# Altium PCB PCB.PcbDoc
Units mil, origin at the board's own origin, x right, y up, seen from the top; angles counter-clockwise.
Board outline 2247 x 1385 mil, 4 copper layers (Top Layer, Layer 1, Layer 2, Bottom Layer), stack 51.756 mil thick; 28 components, 43 nets, 111 pads, 38 vias.
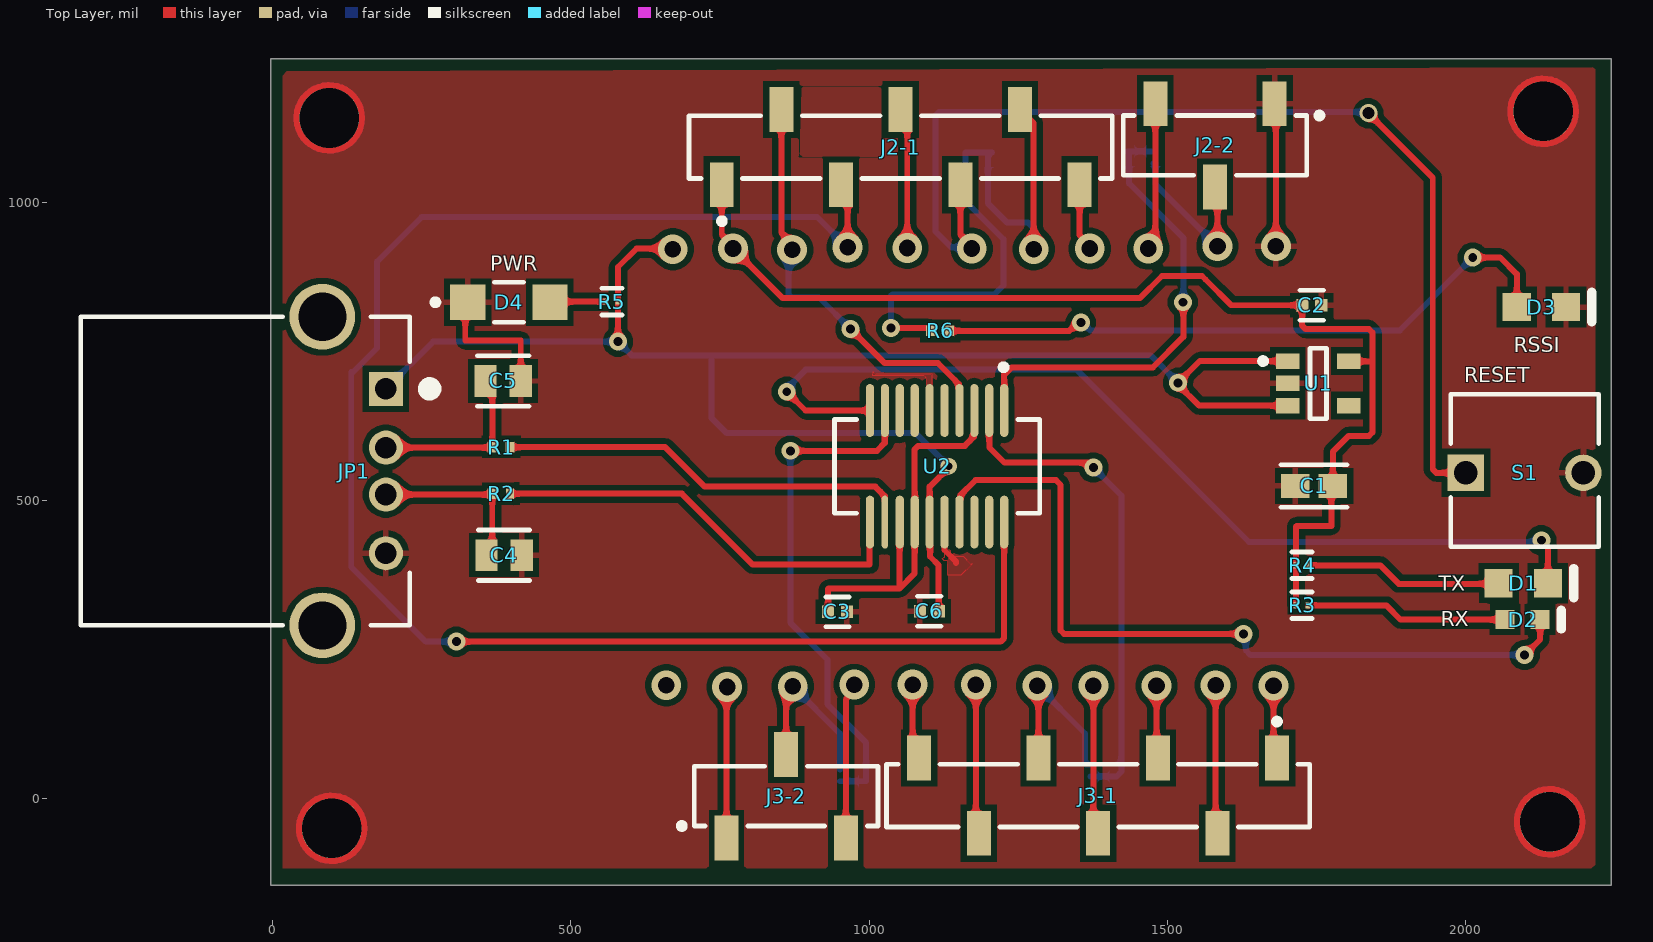
[diagram p0: Top Layer view]
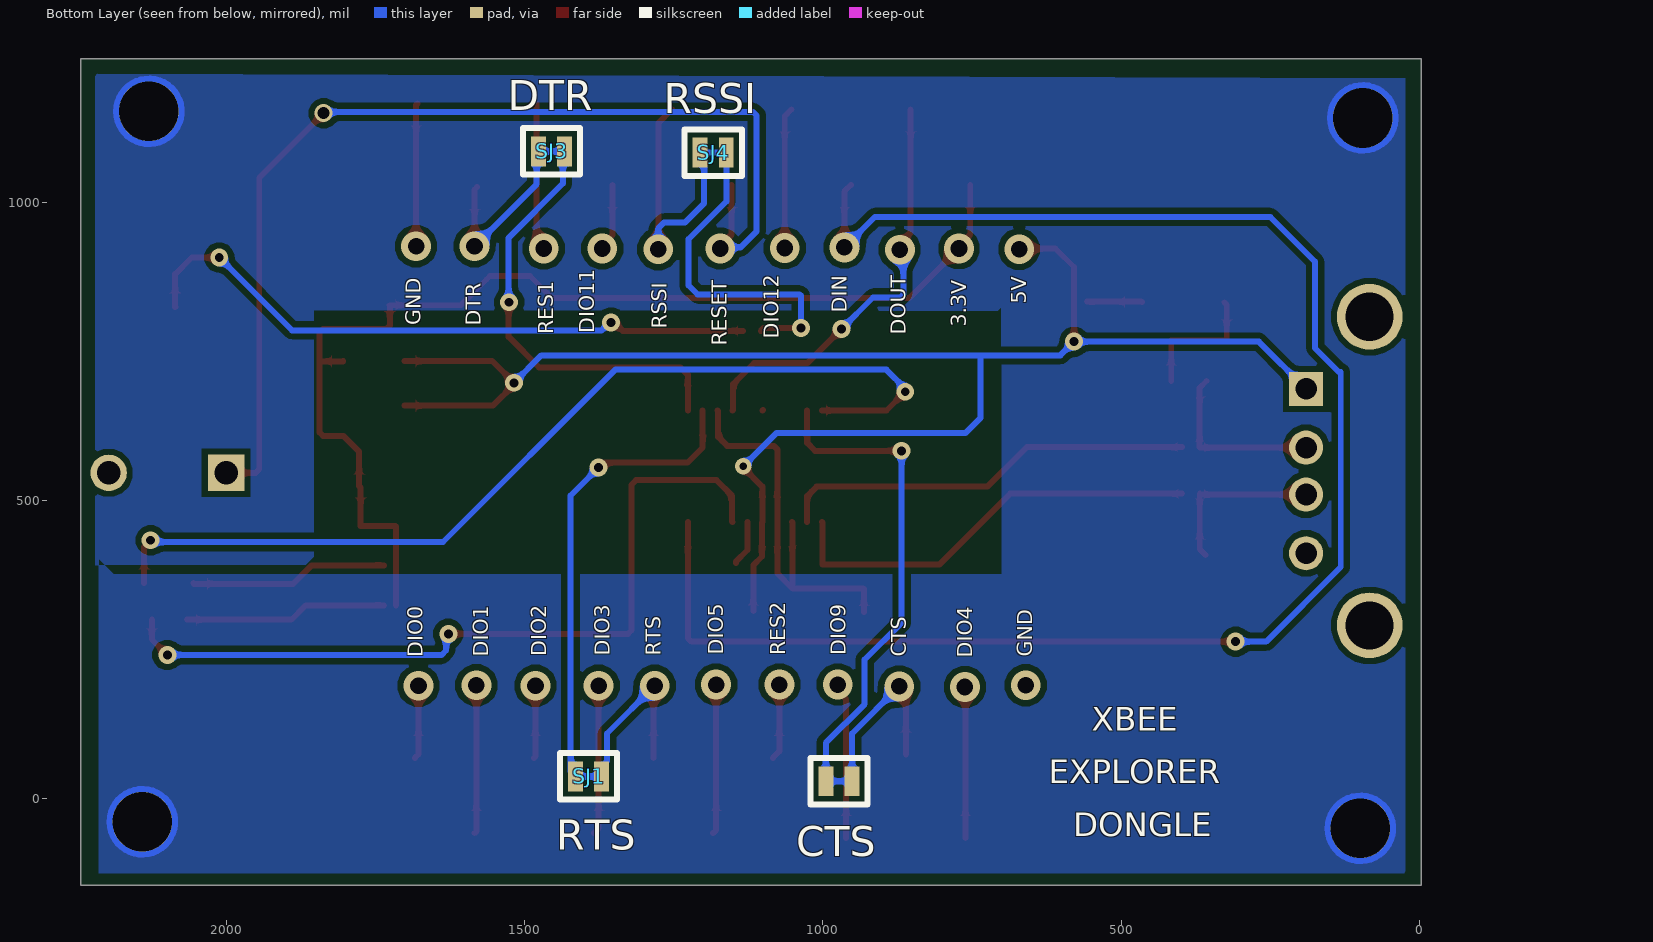
[diagram p1: Bottom Layer view, seen from below]
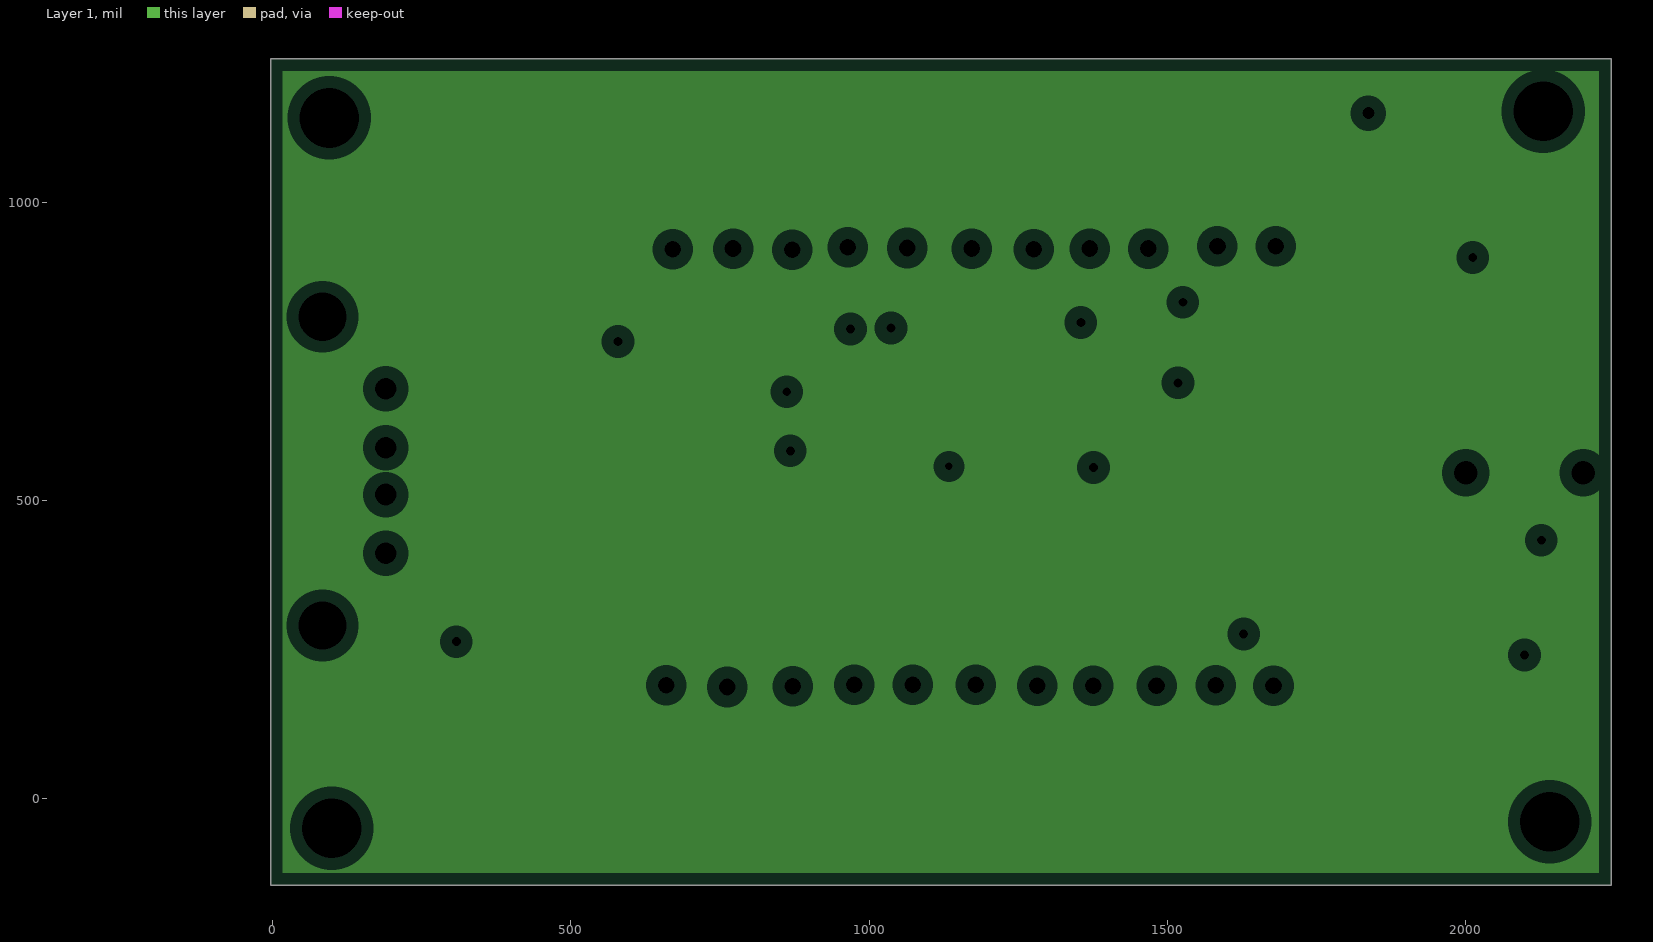
[diagram p2: Layer 1, clearances drawn from the general rule]
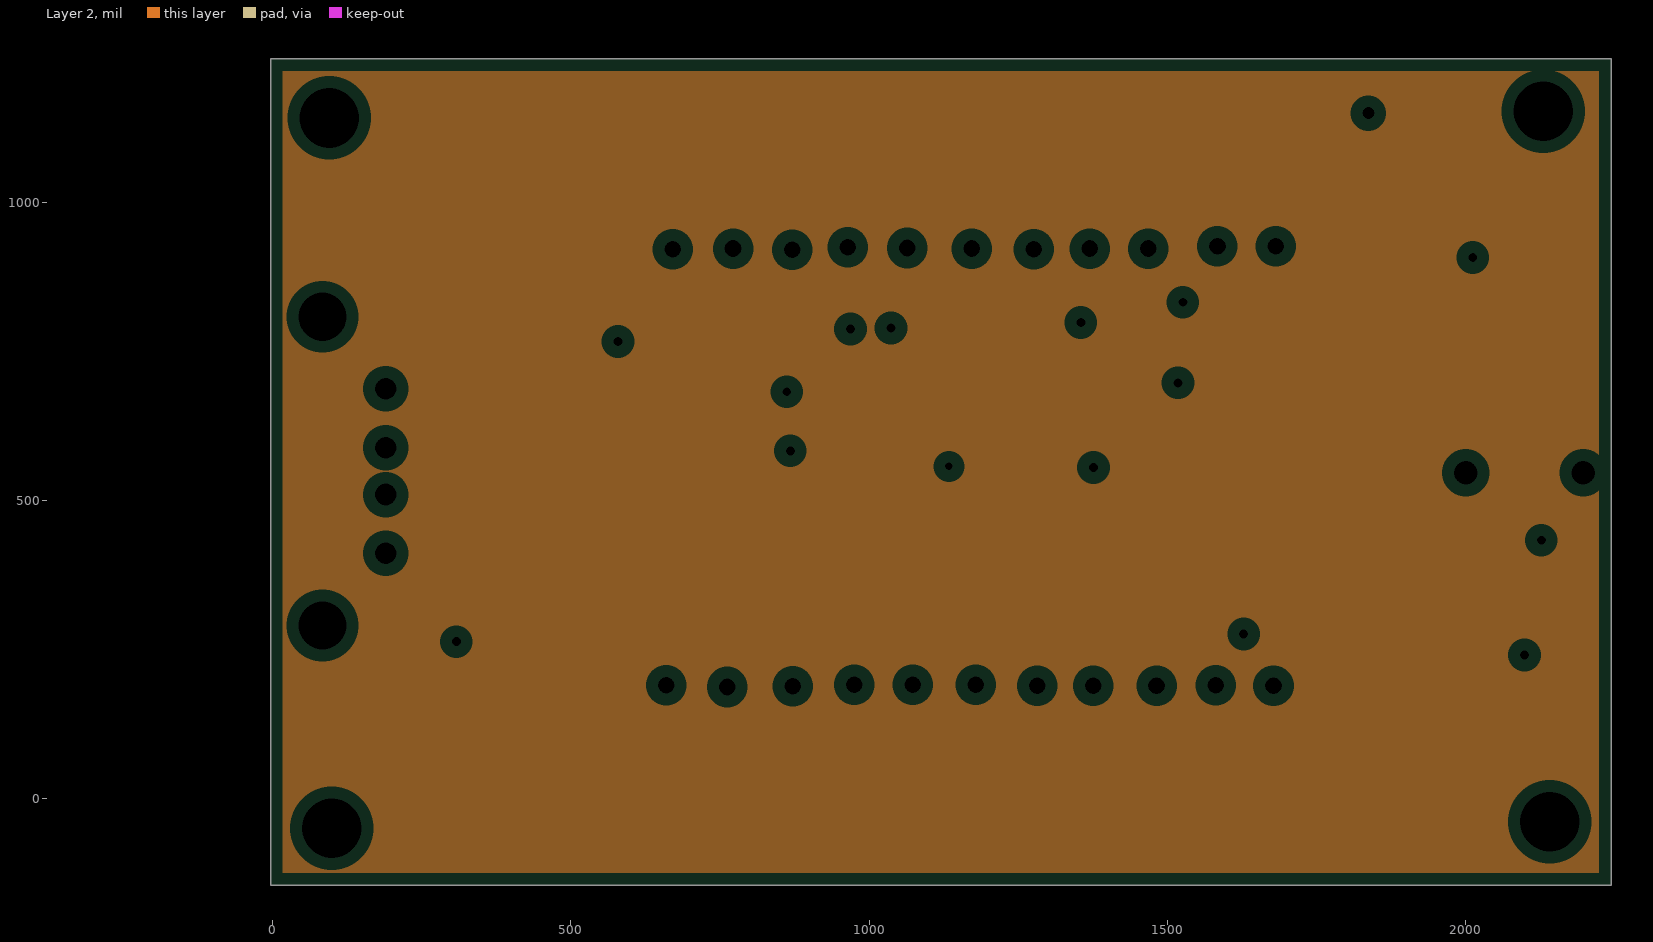
[diagram p3: Layer 2, clearances drawn from the general rule]
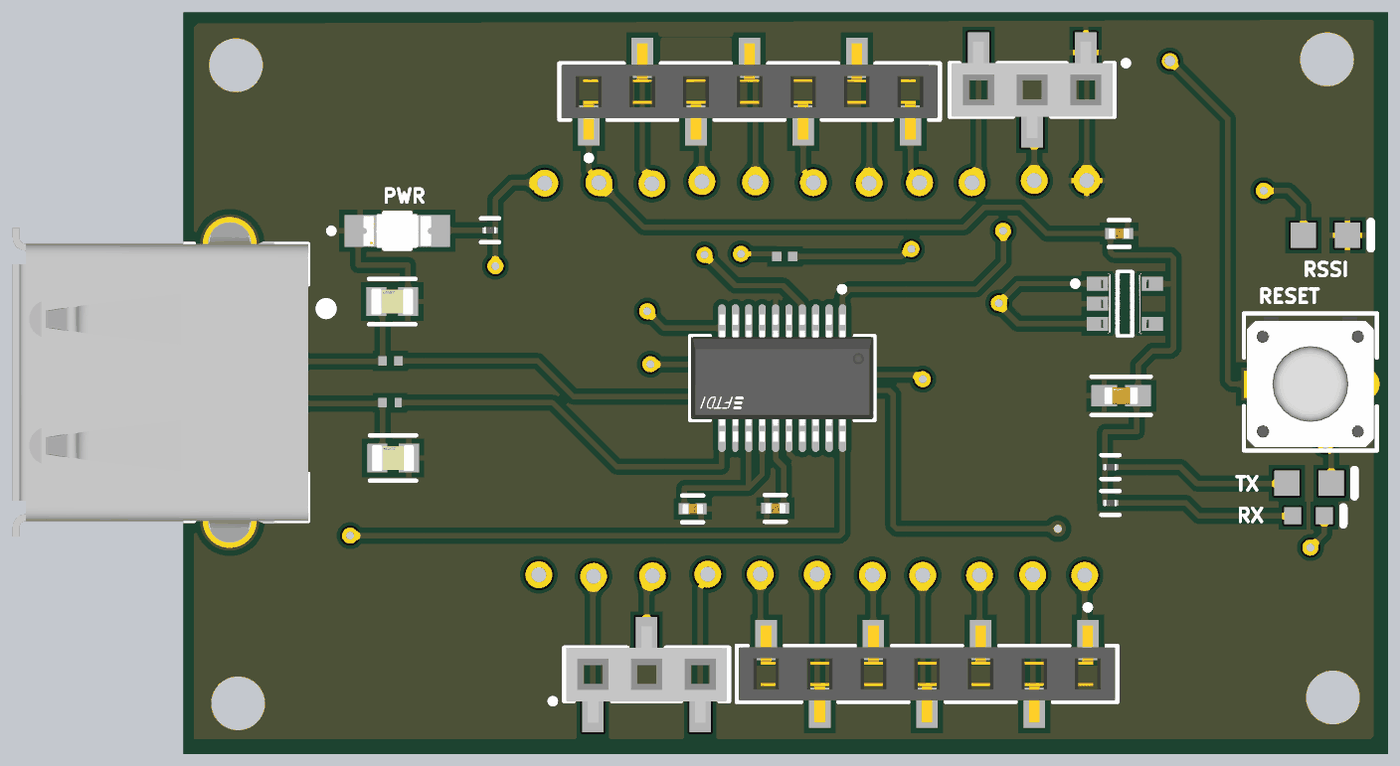
[diagram p4: 3D render of the assembled board from above, using the file's embedded part models]

## Layer stack, top to bottom
Top Solder: solder mask 0.4, Solder Resist, Dk 3.5
Top Layer: signal copper 1.4
Dielectric 2: prepreg 8.8, PP-006, Dk 4.1
Layer 1: plane copper 1.378
Dielectric 1: core 28.6, FR-4, Dk 4.8
Layer 2: plane copper 1.378
Dielectric 3: prepreg 8.8, PP-006, Dk 4.1
Bottom Layer: signal copper 1.4
Bottom Solder: solder mask 0.4, Solder Resist, Dk 3.5

## Board outline
-3,-145 2244,-145 2244,1240 -3,1240

## Design rules (kind name [scope] priority, off if disabled: settings)
Clearance [All] p1: gap=10 ignorepadtopadclearanceinfootprint=FALSE
PlaneClearance [All] p1: clearance=20
PlaneConnect [All] p1: planeconnectstyle=Relief reliefexpansion=20 reliefentries=4 reliefconductorwidth=10 reliefairgap=10
PolygonConnect [All] p1: connectstyle=Relief reliefconductorwidth=10 reliefentries=4 polygonreliefangle="90 Angle" airgapwidth=10
RoutingVias [All] p1: holewidth=20 width=30 viastyle="Through Hole" minholewidth=10 minwidth=20 maxholewidth=40 maxwidth=50
ShortCircuit [All] p1: allowed=TRUE
SolderMaskExpansion [All] p1: expansion=4 istentingtop=FALSE
SupplyNets "Schematic Supply Nets_2" [InNet('5V')] p1: voltage=0.000
SupplyNets "Schematic Supply Nets_1" [InNet('GND')] p2: voltage=0.000
SupplyNets "Schematic Supply Nets" [InNet('3.3V')] p3: voltage=0.000
Width [All] p1: maxlimit=20 minlimit=5 preferedwidth=10
27 further rules are at their usual default settings.

## Classes and differential pairs
component class Xbee: J2-1 J2-2 J3-1 J3-2
component class regulator: C1 C2 D3 D4 R5 R6 S1 U1
component class USB: C3 C4 C5 C6 D1 D2 JP1 R1 R2 R3 R4 U2

## Components (designator, comment, footprint, x,y, rotation, side; value= is the part's Value field where it differs from the comment)
C1 "10uF" FP-GRM188-0_1-e0_2_0_55-IPC_A 1746,524 r180 top
C2 "0.1uF" FP-C0402-BB-MFG 1742.25,827 r0 top value="0.10 μF"
C3 "0.1uF" FP-C0402-BB-MFG 947,313 r0 top value="0.10 μF"
C4 "47pF" FP-C0805C-DN-MFG 388,408 r0 top value="47 pF"
C5 "47pF" FP-C0805C-DN-MFG 386.53,700 r0 top value="47 pF"
C6 "0.1uF" FP-C0402-BB-MFG 1101,314 r180 top value="0.10 μF"
CTS "Solder Jumper" "Solder Jumper-Footprint-1"#1 973,29 r180 bottom (schematic designator SJ2)
D1 "Green" AVAG-HSMX-C170_V 2096.66,361 r0 top
D2 "Yellow" AVAG-HSMX-C190_V 2095.47,300 r0 top
D3 "Green" AVAG-HSMX-C170_V 2127,824 r0 top
D4 "Red" FP-HSMS-C150-MFG 396,832 r0 top
J2-1 "SSM-107-L-SV-BE" FP-SSM-107-L-SV-BE-MFG#1 1053,1092 r0 top
J2-2 "SSM-103-L-SV" SMTC-SSM-103-X-SV 1580,1095.02 r180 top
J3-1 "SSM-107-L-SV-BE" FP-SSM-107-L-SV-BE-MFG#2 1384,5 r180 top
J3-2 "SSM-103-L-SV" SMTC-SSM-103-X-SV 861,4 r0 top
JP1 "USB-A-H" TE-292303-1_V 145,549 r270 top
R1 "33" RESC0603X26X15ML03T05#1 383.24,589 r0 top
R2 "33" RESC0603X26X15ML03T05#2 383,511 r0 top
R3 "1K" FP-ERJ1GN-IPC_C 1726,324 r180 top
R4 "1K" FP-ERJ1GN-IPC_C 1726,391 r180 top
R5 "1K" FP-ERJ1GN-IPC_C 568.99,833 r0 top
R6 "330" RESC0603X26X15ML03T05#3 1119,784 r0 top
S1 "" FP-B3F-6022-MFG 2099,550 r0 top
SJ1 "Solder Jumper" "Solder Jumper-Footprint-1"#2 1393,37 r180 bottom
SJ3 "Solder Jumper" "Solder Jumper-Footprint-1"#2 1455,1085 r0 bottom
SJ4 "RSSI" "Solder Jumper-Footprint-1"#2 1184,1083 r180 bottom
U1 "MIC5219-2.5YM5-TR" FP-SOT23-5LD-PL-1-MFG 1753,696 r0 top
U2 "FT231XS-R" FP-SSOP-20-MFG 1114,557 r270 top

## Footprints (in the part's own frame and the unit in brackets; to place one, negate y for a bottom-side part, rotate by r counter-clockwise, add the part's x,y. Pads: shape width x height; smd on the part's side, far side on the other; paste and mask are expansions set on the pad)
AVAG-HSMX-C170_V [mm] "SMD, 2-Leads, Body 2x1.25mm, Height 0.8mm"
  rect 1.2x1.2 smd: 1(-1.05,0) 2(1.05,0)
  silkscreen extent 2.15,-0.63 2.15,0.63, body extent -1,-0.63 1,0.63, height 0.8
AVAG-HSMX-C190_V [mm] "SMD, 2-Leads, Body 1.6x0.8mm, Height 0.9mm"
  rect 0.8x0.8 smd: 1(-0.75,0) 2(0.75,0)
  silkscreen extent 1.65,-0.4 1.65,0.4, body extent -0.8,-0.4 0.8,0.4, height 0.9
FP-B3F-6022-MFG [mm]
  rect 1.55x1.55 hole 1 paste-2539.97 mask-2539.97: 1(-2.5,-0.1)
  round 1.55 hole 1 paste-2539.97 mask+0: 2(2.5,-0.1)
  silkscreen extent -3.15,-3.25 3.15,3.25, body extent -3.37,-3.35 3.37,3.35, height 0.25
FP-C0402-BB-MFG [mm]
  rect 0.52x0.52 smd paste+0 mask+0: 1(-0.4,0) 2(0.4,0)
  silkscreen extent -0.5,-0.64 0.5,0.64, body extent -0.8,-0.4 0.8,0.4, height 0.25
FP-C0805C-DN-MFG [mm]
  rect 0.95x1.35 smd paste+0 mask+0: 1(-0.75,0) 2(0.75,0)
  silkscreen extent -1.1,-1.07 1.1,1.07, body extent -1.4,-0.85 1.4,0.85, height 0.25
FP-ERJ1GN-IPC_C [mil]
  rect 8.94x10.34 smd paste+0 mask+0: 1(-10.01,0) 2(10.01,0)
  silkscreen extent -17,-22 17,22, body extent -12,-6 12,6, height 10
FP-GRM188-0_1-e0_2_0_55-IPC_A [mil]
  rect 47.57x39.85 smd paste+0 mask+0: 1(-31.57,0) 2(31.57,0)
  silkscreen extent -55,-36 55,36, body extent -75,-40 75,40, height 10
FP-HSMS-C150-MFG [mm]
  rect 1.5x1.5 smd paste+0 mask+0: 1(-1.75,0) 2(1.75,0)
  silkscreen extent -3.25,-0.85 0.63,0.85, body extent -2.6,-0.95 2.6,0.95, height 0.25
FP-SOT23-5LD-PL-1-MFG [mm]
  rect 1x0.66 smd paste+0 mask+0: 1(-1.3,0.95) 2(-1.3,0) 3(-1.3,-0.95) 4(1.3,-0.95) 5(1.3,0.95)
  silkscreen extent -2.47,-1.5 0.35,1.5, body extent -1.9,-1.6 1.9,1.6, height 0.25
FP-SSM-107-L-SV-BE-MFG#1 [mm]
  rect 1.02x1.905 smd paste+0 mask+0: 1(-7.62,-1.603) 2(-5.08,1.603) 3(-2.54,-1.603) 4(0,1.603) 5(2.54,-1.603) 6(5.08,1.603) 7(7.62,-1.603)
  round 1.02 on Mech16 paste-2539.97 mask+0: ""(-7.62,0) ""(-5.08,0) ""(-2.54,0) ""(0,0) ""(2.54,0) ""(5.08,0)
  oval 0.004x1.02 on Mech16 paste-2539.97 mask+0: ""(7.62,0)
  silkscreen extent -9.02,-3.27 9.02,1.34, body extent -9.12,-2.66 9.12,2.66, height 0.25
FP-SSM-107-L-SV-BE-MFG#2 [mm]
  rect 1.02x1.905 smd paste+0 mask+0: 1(-7.62,-1.603) 2(-5.08,1.603) 3(-2.54,-1.603) 4(0,1.603) 5(2.54,-1.603) 6(5.08,1.603) 7(7.62,-1.603)
  round 1.02 on Mech16 paste-2539.97 mask+0: ""(-7.62,0) ""(-5.08,0) ""(-2.54,0) ""(0,0) ""(2.54,0) ""(5.08,0) ""(7.62,0)
  silkscreen extent -9.02,-3.27 9.02,1.34, body extent -9.12,-2.66 9.12,2.66, height 0.25
FP-SSOP-20-MFG [mm]
  rrect100% 2.25x0.349 smd paste+0 mask+0: 1(-2.375,2.857) 2(-2.375,2.222) 3(-2.375,1.587) 4(-2.375,0.952) 5(-2.375,0.317) 6(-2.375,-0.318) 7(-2.375,-0.953) 8(-2.375,-1.588) 9(-2.375,-2.223) 10(-2.375,-2.858) 11(2.375,-2.857) 13(2.375,-1.587) 14(2.375,-0.952) 15(2.375,-0.317) 16(2.375,0.318) 17(2.375,0.953) 18(2.375,1.588) 19(2.375,2.223) 20(2.375,2.858)
  rrect100% 2.25x0.273 smd paste+0 mask+0: 12(2.375,-2.222)
  silkscreen extent -4.34,-4.37 1.99,4.37, body extent -3.6,-4.62 3.6,4.62, height 0.25
RESC0603X26X15ML03T05#1 [mm] "Chip Resistor, 2-Leads, Body 0.60x0.30mm, IPC Low Density"
  rect 0.398x0.45 smd paste+0 mask-2539.97: 1(-0.375,0) 2(0.375,0)
  body extent -0.32,-0.16 0.32,0.17, height 0.26
RESC0603X26X15ML03T05#2 [mm] "Chip Resistor, 2-Leads, Body 0.60x0.30mm, IPC Low Density"
  rect 0.398x0.45 smd mask-2539.97: 1(-0.375,0)
  rect 0.347x0.45 smd mask-2539.97: 2(0.375,0)
  body extent -0.32,-0.16 0.32,0.17, height 0.26
RESC0603X26X15ML03T05#3 [mm] "Chip Resistor, 2-Leads, Body 0.60x0.30mm, IPC Low Density"
  rect 0.448x0.45 smd mask-2539.97: 1(-0.375,0) 2(0.375,0)
  body extent -0.32,-0.16 0.32,0.17, height 0.26
SMTC-SSM-103-X-SV [mm] "C.L. Surface Mount Socket Strip, 3 Pins, Vertical, 2.54 mm Pitch, Female"
  rect 1.02x1.905 smd: 1(-2.54,-1.777) 2(0,1.777) 3(2.54,-1.777)
  silkscreen extent -4.57,-1.39 3.91,1.27, body extent -3.81,-2.29 3.81,2.29, height 7.42
"Solder Jumper-Footprint-1"#1 [mil]
  rect 25x50 smd mask+4: 1(-22,0) ""(22,0)
  Top Layer lines w10: 22,0 -22,0
  silkscreen extent -48,-39 48,39
"Solder Jumper-Footprint-1"#2 [mil]
  rect 25x50 smd mask+4: 1(-22,0) 2(22,0)
  Top Layer lines w10: 22,0 -22,0
  silkscreen extent -48,-39 48,39
TE-292303-1_V [mm] "THD, 4-Leads, Body 13.13x14mm, Pitch 2.5mm"
  rect 1.45x1.45 hole 0.92: 1(-3.5,1.144)
  round 1.45 hole 0.92: 2(-1,1.144) 3(1,1.144) 4(3.5,1.144)
  round 2.8 hole 2.046 mask-2539.97: 5(-6.57,-1.566) 6(6.57,-1.566)
  silkscreen extent -6.57,-11.85 6.57,3.25, body extent -8.12,-11.85 8.12,2.15, height 7.72

## Part data
C1: library part CMP-2006-02792-2, "Chip Multilayer Ceramic Capacitors for General Purpose, 0603, 10uF, X5R, 15%, 20%, 6.3V", Case Code (Imperial)=0603, Case Code (Metric)=1608, Dielectric=X5R, Max Operating Temperature=85°C, Min Operating Temperature=-55°C, Package Quantity=4000, Tolerance=20%, Voltage=6.3V, Capacitance=10uF, Case/Package=0603, Depth=0.8mm, Height=0.8mm, Lead Free="Lead Free", Length=1.6mm, Material=Ceramic, Mount="Surface Mount", Packaging="Tape and Reel", Radiation Hardening=No, REACH SVHC="No SVHC", Termination=SMD/SMT, Thickness=0.035inch, Voltage Rating=6.3V, Voltage Rating (DC)=6.3V, Width=0.031inch
C2 C3 C6: library part CMP-2008-02046-2, "CAP CER 0.1UF 10V X5R 0402", Capacitance="0.10 μF", Manufacturer=Kemet, Manufacturer Part Number=C0402C104K8PACTU, Package=C0402-BB, Temperature="-55°C to +125°C", Temperature Characteristic=X5R, Temperature Coefficient=15%, Temperature Range High=+125°C, Temperature Range Low=-55°C, Tolerance=0.1, Voltage Rating="10 V", Automotive=No, Category=Cap, ComponentLink2Description=Datasheet, ComponentLink2URL=https://content.kemet.com/datasheets/KEM_C1002_X7R_SMD.pdf, Device Class L1="Passive Components", Device Class L2=Capacitors, Device Class L3="Ceramic Capacitors", Digikey Description="CAP CER 0.1UF 10V X5R 0402", Height=0.55mm, Ipc Land Pattern Name=CAPC10050X50, Lead Free=Yes, Material=Ceramic, Mouser Description="Capacitor 100 nF 10 VDC 0402", Octopart=https://octopart.com/c0402c104k8pactu-kemet-140039, RoHS=TRUE
C4 C5: library part CMP-2007-00435-2, "CAP CER 47PF 50V C0G/NP0 0805", Capacitance="47 pF", Manufacturer=KEMET, Manufacturer Part Number=C0805C470J5GACTU, Package=C0805C-DN, Temperature="-55°C to +125°C", Temperature Characteristic=C0G, Temperature Coefficient=30ppm/°C, Temperature Range High=+125°C, Temperature Range Low=-55°C, Tolerance=0.05, Voltage Rating="50 V", Automotive=No, Category=Cap, ComponentLink2Description=Datasheet, ComponentLink2URL=https://content.kemet.com/datasheets/KEM_C1003_C0G_SMD.pdf, Device Class L1="Passive Components", Device Class L2=Capacitors, Device Class L3="Ceramic Capacitors", Digikey Description="CAP CER 47PF 50V C0G/NP0 0805", Height=0.88mm, Ipc Land Pattern Name=CAPC200125X78, Lead Free=Yes, Material=Ceramic, Mouser Description="Multilayer Ceramic Capacitors MLCC - SMD/SMT 50volts 47pF C0G 5%", Octopart=https://octopart.com/c0805c470j5gactu-kemet-150274, RoHS=TRUE
CTS SJ1 SJ3 SJ4: library part CMP-00030-00001-2, "2 pad Solder Jumper"
D1 D3: library part CMP-2000-05062-1, "Chip LED, Green, 2.2 V, -40 to 85 degC, 2-Pin SMD, Pb-Free, Tape and Reel", Forward Current If=20mA, Forward Voltage=2.2V, Forward Voltage VF Max=2.6V, Manufacturer=Avago, Operating Temperature Max=85degC, Operating Temperature Min=-30degC, Operating Temperature Range=-30degCto+85degC, Opto Case Style=SMD, Package Description="2-Pin Surface Mount Device, Body 2 x 1.25 mm, Height 0.8 mm", Package Reference=HSMX-C170, Storage Temperature Min=-40degC, Bulb Size=1.25mmx1.4mm, Datasheet URL=https://datasheet.ciiva.com/29280/180495-da-01-en-chip-led-hsmg-c170-gelb-gruen-29280971.pdf, Datasheet Version=Oct-08, Dominant Wavelength=572nm, Dominant Wavelength Typ=572nm, External Depth=0.8mm, External Length / Height=2mm, External Width=1.25mm, Forward Current If Max=20mA, LED Colour=Green, LED Mounting=SMD, LED Type=Standard, Lens Shape=Rectangular, Light Area Height=1mm, Luminous Intensity=15mcd, Luminous Intensity Min=4mcd, Luminous Intensity Typ=15mcd, Manufacturer URL=http://www.avagotech.com/, Mounting Type=SMD, MSL=MSL2A-4weeks, No. of Pins=2, Opto Mounting Orientation=Top, Packaging=CutTape, Peak Forward Current=20mA, Peak Wavelength=570nm, PIV Max=5V, Storage Temperature Max=85degC, SVHC=NoSVHC(16-Jun-2014), Viewing Angle=170deg, Voltage Vf Typ=2.2V, Wavelength Typ=570nm
D2: library part CMP-1744-00003-1, "LED Uni-Color Yellow, 65 mW, 20 mA, -40 to 85 degC, 2-Pin SMD, RoHS, Tape and Reel", Case Code (Imperial)=0603, Case Code (Metric)=1608, Max Operating Temperature="155 degC", Min Operating Temperature="-55 degC", Package Quantity=5000, Power Rating="100 mW", Resistance="390 Ohm", Tolerance=1%, Voltage Rating="50 V", Case\Package=0603, ComponentLink1Description="Manufacturer URL", ComponentLink1URL=http://www.avagotech.com/, ComponentLink2Description=Datasheet, ComponentLink2URL=http://docs.avagotech.com/docs/AV02-0551EN, ComponentLink3Description="Package Specification", ComponentLink3URL=http://www.fairchildsemi.com/dwg/MA/MA03D.pdf, DatasheetVersion=Mar-12, Height="0.45 mm", Length="1.6 mm", Mount="Surface Mount", PackageDescription="2-Pin Surface Mount Device, Body 1.6 x 0.8 mm, Height 0.9 mm", PackageReference=HSMX-C190, Packaging="Tape and Reel", Pins=2, REACH SVHC="No SVHC", RoHSCompliant=true, Voltage Rating (DC)="50 V", Width="0.8 mm"
D4: library part CMP-21615-000001-1, "LED RED DIFFUSED CHIP SMD", Case Code (Imperial)=1206, Case Code (Metric)=3216, Forward Current=20mA, Forward Voltage=2.1V, Lens Color=White, Max Operating Temperature=85°C, Min Operating Temperature=-40°C, Package Quantity=1, Power Dissipation=65mW, Reverse Voltage=5V, Case/Package=1206, Color=Red, Depth=1.6mm, Dominant Wavelength=626nm, Height=1.1mm, Illumination Color=Red, Lead Free="Lead Free", Length=3.2mm, Lens Style=Rectangular, Lens Transparency=Diffused, Luminous Intensity=10mcd, Mount="Surface Mount", Number of Elements=1, Number of LEDs=1, Number of Pins=2, Packaging="Tape and Reel", Power Rating=65mW, Radiation Hardening=No, REACH SVHC="No SVHC", Test Current=20mA, Viewing Angle=170°, Wavelength=626nm, Width=1.6mm
J2-1 J3-1: library part CMP-02766-001731-1, "CONN RCPT 7POS 0.1 GOLD SMD", Contact Resistance=10mR, Housing Color=Black, Max Current Rating=6.9A, Max Operating Temperature=125°C, Max Voltage Rating (AC)=475V, Min Operating Temperature=-55°C, Voltage Rating (AC)=405V, Voltage Rating (DC)=572V, Connector Type=Receptacle, Contact Finish - Mating=GOLD, Contact Material=Bronze, Contact Plating=Gold, Contact Shape=Square, Contact Type="Female Socket", Depth=2.54mm, Fastening Type=Pull, Gender=Female, Housing Material=Polymer, Insulation Color=Black, Insulation Material=Polymer, Lead Free="Lead Free", Length=17.78mm, Number of Contacts=7, Number of Positions=7, Number of Rows=1, Orientation=Straight, Packaging=Rail/Tube, Pitch=2.54mm, Radiation Hardening=No, RoHS Compliant=Yes, Series=SSM, Termination=Solder
J2-2 J3-2: library part CMP-1023-00201-1, "Tiger Claw(TM) Surface Mount Socket, Vertical, -55 to 125 degC, 2.54 mm Pitch, 3-Pin, Female, RoHS", Manufacturer=Samtec, Temperature Range="-55 to 125 degC", ComponentLink1Description="Manufacturer URL", ComponentLink1URL=http://www.samtec.com, ComponentLink2Description=Datasheet, ComponentLink2URL=http://www.samtec.com/documents/webfiles/pdf/SSM_SM.PDF, ComponentLink3Description="Package Specification", ComponentLink3URL=http://www.samtec.com/documents/webfiles/cpdf/SSM-1XX-XXX-XX-XX-XX-X-XX-XX-MKT.pdf, DatasheetVersion=F-214, Mounting Technology="Surface Mount", Orientation=Vertical, PackageDescription=".100 C.L. Surface Mount Socket Strip", PackageReference=SSM-103-X-SV, PackageVersion="CR, 9/1998", PartNumber=SSM-103-L-SV, Pitch="2.54 mm", RoHS=True
JP1: library part CMP-2000-05404-1, "1 Port Right Angle Through Hole Mount Female Type A USB Connector, 4 Position, -55 to 85 degC, RoHS, Tube", Manufacturer="TE Connectivity", Package Description="4-Pin Through Hole Device, Body 14 x 13.13 mm, Pitch 2.5 mm", Package Reference=292303-1, Connector Mounting=PCB, Connector Type=USBA, Contact Material=Copper, Contact Plating=Gold, Contact Termination Type=Solder, Datasheet URL=http://www.farnell.com/cad/1653030.pdf, Datasheet Version=Feb-12, Gender=Receptacle, Manufacturer URL=http://www.te.com/, No. of Contacts=4, SVHC=NoSVHC(16-Jun-2014)
R1 R2: library part CMP-2004-03506-1, Manufacturer=Panasonic, Part Number=ERJ1GNF33R0C
R3 R4 R5: library part CMP-1010-00416-3, "RES SMD 1K OHM 1% 1/20W 0201", Case Code (Imperial)=0201, Case Code (Metric)=0603, Max Operating Temperature=125°C, Max Power Dissipation=50mW, Min Operating Temperature=-55°C, Package Quantity=15000, Resistance=1kR, Resistance Tolerance=1%, Resistor Type="Thick Film", Temperature Coefficient=200ppm/°C, Voltage Rating=25V, Case/Package=0201, Contact Plating=Tin, Features="Automotive AEC-Q200", Height=0.01inch, Lead Free="Lead Free", Length=0.6mm, Mount="Surface Mount", Number of Pins=2, Number of Terminations=2, Packaging="Tape and Reel", Power Rating=50mW, Radiation Hardening=No, RoHS Compliant=Yes, Series=ERJ, Size Code=0201, Termination=SMD/SMT, Tolerance=1%, Voltage Rating (DC)=25V, Weight=6E-06oz, Width=0.012inch
R6: library part CMP-2004-03502-1, Manufacturer=Panasonic, Part Number=ERJ1GNF3300C
S1: library part CMP-08834-000012-1, "SWITCH TACTILE SPST-NO 0.05A 24V", Case/Package=Radial, Max Operating Temperature=70°C, Max Voltage Rating (DC)=24V, Min Operating Temperature=-25°C, Operating Force=1.47N, Package Quantity=1000, Actuator Type=Standard, Contact Plating=Gold, Illumination Type=Non-Illuminated, Mechanical Life=300000Cycles, Mount="Through Hole", Packaging="Ammo Pack", Switch Function=Off-Mom, Switch Travel=0.25mm, Termination="PC Pins", Throw Configuration=SPST
U1: library part CMP-00252-66802246-1, "MIC5219-2.5YM5-TR LDO Regulator Pos 2.5V 0.5A 5-Pin SOT-23 T/R", Ambient Temperature Range High=125°C, Case/Package=SOT-23, Dropout Voltage=350mV, Max Input Voltage=12V, Max Output Current=500mA, Min Input Voltage=2.5V, Min Operating Temperature=-40°C, Min Supply Voltage=3.5V, Output Voltage Accuracy=1%, Accuracy=1%, Height=1.1mm, Lead Free="Lead Free", Length=2.9mm, Lifecycle Status=Production, Max Junction Temperature (Tj)=125°C, Max Operating Temperature=125°C, Max Supply Voltage=12V, Min Output Voltage=2.5V, Mount="Surface Mount", NexarPartId=66802246, Nominal Output Voltage=2.5V, Number of Outputs=1, Number of Pins=5, Number of Regulators=1, Output Current=500mA, Output Type=Fixed, Output Voltage=2.5V, Packaging="Tape and Reel", Polarity=Positive, REACH SVHC="No SVHC", RoHS=Compliant, Schedule B=8542390000, Width=1.6mm
U2: library part CMP-0248-00024-3, "IC USB SERIAL FULL UART 20SSOP", Case/Package=SSOP, Max Operating Temperature=85°C, Max Supply Voltage=5.5V, Min Operating Temperature=-40°C, Min Supply Voltage=2.97V, Operating Supply Current=8mA, Operating Supply Voltage=5V, Package Quantity=2000, Data Rate=12Mbps, Height=0.059inch, Interface=UART, Length=8.74mm, Mount="Surface Mount", Number of Channels=1, Number of Pins=20, Packaging="Tape and Reel", Radiation Hardening=No, Weight=0.016oz, Width=0.157inch

## Free pads (board coordinates)
  round 100 hole 100 paste-99999 mask-99999: 2(95,1141) 2(99,-50) 2(2130,1152) 2(2141,-39)

## Via types
v1: diameter 50, hole 28, Top Layer to Bottom Layer, 22 vias
v2: diameter 30, hole 15, Top Layer to Bottom Layer, 14 vias
v3: diameter 28, hole 12, Top Layer to Bottom Layer, 1 vias
v4: diameter 30, hole 20, Top Layer to Bottom Layer, 1 vias

## Nets (pads, with @x,y where several pads share a name; then routed paths per layer and width w, separated by ;. In a path a pad name is that pad's centre, name@x,y a point inside that pad or via, vN(x,y) a via of type N, cw(c..) or ccw(c..) an arc to the next point about the centre after c; other vN are vias at no path point)
3.3V: C1.1 C2.1 J2-1.1 R3.2 R4.2 U1.5 | length 1900.6
  Top Layer w10: J2-1.1 753,945.43 772,926.43 v1(772,922) 855,839 1454,839 1491,876 1558.14,876 1564,870.14 1607.14,827 C2.1 1726,826.5 1726,792.86 1731.86,787 1838.14,787 1844,781.14 1844,733 ; R3.2 R4.2 1715.99,455.99 1717,457 1775,457 1775,521.43 C1.1 1777.57,581.57 1804,608 1838.14,608 1844,613.86 1844,733 ; U1.5 1804.58,733 1844,733
5V: C6.1 JP1.1 R5.2 U1.1 U1.3 U2.15 | length 2819
  Top Layer w10: v2(579,766) R5.2 579,891 610,922 670,922 v1(671,921) ; C6.1 1116.75,391.25 1102.22,405.78 1102.22,462.78 U2.15 1101.5,522.79 1133.68,554.97 v3(1133.68,557) ; U1.3 1553.4,658.6 1518,694 v2(1518,697) 1554.4,733.4 U1.1
  Bottom Layer w10: JP1.1 269.24,766 v2(579,766) 602,743 736,743 ; v3(1133.68,557) 1077.68,613 760.72,613 736,637.72 736,743 ; v2(1518,697) 1472,743 736,743
GND: C1.2 C2.2 C3.2 C4.2 C5.2 C6.2 D3.2 D4.1 J2-2.1 JP1.4 pad.2 S1.2 U1.2 U2.6 U2.16 | length 3252.4
  Top Layer w10: D4.1 323,827.9 323,768 416,768 416.05,767.95 C5.2 ; U2.6@1100.78,651.22 U2.6 ; U2.16 1126.5,416.77 1146,397.27 1146,395 ; J2-2.1 1682,1163 v1(1682,926) v1@1688.52,926
  Top Layer w12.5: 148.75,1141 ccw(c95,1141) 148.75,1141 ; 152.75,-50 ccw(c99,-50) 152.75,-50 ; 2183.75,1152 ccw(c2130,1152) 2183.75,1152 ; 2194.75,-39 ccw(c2141,-39) 2194.75,-39
  Bottom Layer w12.5: 148.75,1141 ccw(c95,1141) 148.75,1141 ; 152.75,-50 ccw(c99,-50) 152.75,-50 ; 2183.75,1152 ccw(c2130,1152) 2183.75,1152 ; 2194.75,-39 ccw(c2141,-39) 2194.75,-39
NetC3_1: C3.1 U2.3 U2.13 U2.14 | length 666.3
  Top Layer w10: C3.1 931.25,351.25 932,352 1051,352 ; U2.13 1051,463 1051,352 ; U2.3 1175.78,649.79 1175.78,606.44 1160.56,591.21 1082.36,591.21 1076.5,585.35 U2.14 1076.5,377.5 1051,352
NetC4_1: C4.1 JP1.3 R2.1 | length 283.4
  Top Layer w10: JP1.3 R2.1@366.35,509.63 ; C4.1 368.24,417.76 R2.1
NetC5_1: C5.1 JP1.2 R1.1 | length 294.4
  Top Layer w10: JP1.2 367.84,588.37 R1.1 368.47,688.53 C5.1
NetD1_1: D1.1 R4.1 | length 332.6
  Top Layer w10: R4.1 1857,391 1888,360 2054.32,360 D1.1
NetD1_2: D1.2 U2.10 | length 1633.5
  Top Layer w10: v2(862,682) 893.5,650.5 U2.10 ; v2(2127,433) 2138,422 D1.2
  Bottom Layer w10: v2(862,682) 862,687.41 893.59,719 1348,719 1637,430 2124,430 v2(2127,433)
NetD2_1: D2.1 R3.1 | length 339.9
  Top Layer w10: R3.1 1867,324 1891,300 D2.1
NetD2_2: D2.2 U2.17 | length 1350.7
  Top Layer w10: U2.17 1152.22,464.21 1152.22,507.57 1178.65,534 1313,534 1321,526 1321,281.86 1326.86,276 v2(1628,276) ; v2(2098.99,240.7) 2125,266.71 D2.2
  Bottom Layer w10: v2(1628,276) 1631.83,272.17 1631.83,248.17 1639.3,240.7 v2(2098.99,240.7)
NetD3_1: D3.1 R6.2 | length 1080.7
  Top Layer w10: R6.2 1335.59,784 1349.59,798 v2(1355,798) ; v2(2012,907) 2058,907 2086,879 2086,824.34 D3.1
  Bottom Layer w10: v2(1355,798) 1357.86,798 1370.86,785 1890,785 v2(2012,907)
NetD4_2: D4.2 R5.1 | length 92.5
  Top Layer w10: D4.2 465.9,833 R5.1@557.03,833
NetJ2-1_2: 
NetJ2-1_3: 
NetJ2-1_4: J2-1.4 | length 236.6
  Top Layer w10: J2-1.4 1064,1144.09 v1(1064,923)
NetJ2-1_5: 
NetJ2-1_6: 
NetJ2-1_7: J2-1.7 | length 114
  Top Layer w10: J2-1.7 1353,944.41 1370,927.41 v1(1370,922)
NetJ2-2_2: 
NetJ2-2_3: J2-2.3 | length 248
  Top Layer w10: v1(1468,922) 1468,931.41 1480,943.41 J2-2.3
NetJ3-1_1: J3-1.1 | length 123.4
  Top Layer w10: v1(1678,189) 1678,74.09 J3-1.1
NetJ3-1_2: J3-1.2 | length 249.3
  Top Layer w10: v1(1581,190) 1581,-55.09 J3-1.2
NetJ3-1_3: J3-1.3 | length 121.7
  Top Layer w10: v1(1482,189) 1482,70.09 J3-1.3
NetJ3-1_4: J3-1.4 | length 250.4
  Top Layer w10: v1(1376,189) 1376,-50.09 J3-1.4
NetJ3-1_5: 
NetJ3-1_6: J3-1.6 | length 251.2
  Top Layer w10: v1(1179,191) 1179,-53.09 J3-1.6
NetJ3-1_7: J3-1.7 | length 127.5
  Top Layer w10: v1(1073,191) 1073,79.09 J3-1.7
NetJ3-2_1: J3-2.1 | length 253.4
  Top Layer w10: J3-2.1 761,186 v1(762,187)
NetJ3-2_2: 
NetJ3-2_3: J3-2.3 | length 262.8
  Top Layer w10: J3-2.3 961,166.18 975,180.18 v1(975,191)
NetR1_2: R1.2 U2.12 | length 705.9
  Top Layer w10: R1.2 658,589 724.21,522.79 1010.56,522.79 1026.5,506.85 U2.12
NetR2_2: R2.2 U2.11 | length 724.2
  Top Layer w10: R2.2 686,511 805,392 1001,392 1001,463 U2.11
NetR6_1: 
NetS1_1: J2-1.5 S1.1 | length 1813
  Top Layer w10: J2-1.5 1153,945.43 1172,926.43 v1(1172,922) ; v4(1837,1149) 1945,1041 1945,551.92 1950.86,546.06 S1.1
  Bottom Layer w10: v1(1172,922) 1169.86,924.14 1137.86,924.14 1111,951 1111,1145.14 1116.86,1151 v4@1837,1151 ; v4@1835,1151 v4(1837,1149)
NetSJ1_1: SJ1.1 SJ1.2 U2.2 | length 791.2
  Top Layer w10: U2.2 1201.5,588.5 1227,563 1368,563 v2(1376,555)
  Bottom Layer w10: v2(1376,555) 1423,508 1423,45 SJ1.1
NetSJ1_2: J3-1.5 | length 295
  Top Layer w10: v1(1282,189) 1284,187 J3-1.5
  Bottom Layer w10: v1(1282,189) 1362,109 1362,62.86 1363.5,61.36 1363.5,57 1371,57
NetSJ2_1: CTS. CTS.1 U2.9 | length 824.8
  Top Layer w10: v2(868,583) 1013.21,583 1026.5,596.29 U2.9
  Bottom Layer w10: v2(868,583) 868,295 930,233 930,158.28 995,93.28 CTS.1
NetSJ2_2: J3-2.2 | length 290.3
  Top Layer w10: J3-2.2 861,166.18 872,177.18 v1(872,188)
  Bottom Layer w10: v1(872,188) 951,109 951,49
NetSJ3_1: SJ3.1 SJ3.2 U2.1 | length 737.6
  Top Layer w10: U2.1 1226.5,710.5 1239,723 1476,723 1527,774 1527,831 v2(1526,832)
  Bottom Layer w10: SJ3.1 1436,1082 1436,1031 1527,940 1527,833 v2(1526,832)
NetSJ3_2: J2-2.2 | length 285.8
  Top Layer w10: J2-2.2 1584,1021.04 v1(1584,926)
  Bottom Layer w10: 1477,1065 1480,1065 1480,1030 v1(1584,926)
NetSJ4_1: J2-1.6 R6.1 SJ4.1 SJ4.2 | length 1028.4
  Top Layer w10: v2(1037,789) 1099.24,789 R6.1 ; J2-1.6 1276,1132.09 v1(1276,921)
  Bottom Layer w10: v2(1037,789) 1037,843 1039,845 1210,845 1225,860 1225,938 1162,1001 SJ4.2 ; SJ4.1 1199,1076 1199,998 1231,966 1266,966 1276,956 v1(1276,921)
NetU2_4: J2-1.2 U2.4 | length 712
  Top Layer w10: J2-1.2 853,948.82 871,930.82 v1(871,920) ; v2(969,787) 1026.2,729.8 1115.56,729.8 1150.78,694.57 1150.78,651.22 U2.4
  Bottom Layer w10: v1(871,920) 865,914 865,845.86 870.86,840 916,840 v2(969,787)
NetU2_20: J2-1.3 U2.20 | length 2825.8
  Top Layer w10: v2(308,263) 1220.64,263 1226.5,268.86 U2.20 ; J2-1.3 964,1017.91 v1(964,924)
  Bottom Layer w10: v2(308,263) 257,263 131.86,388.14 131.86,715 135,715 175,755 175,900 250,975 913,975 v1(964,924)
pads on no net: J2-1. J3-1. JP1.5 JP1.6 U1.4 U2.5 U2.7 U2.8 U2.18 U2.19
copper on no net:
  other v1: 660,190

## Polygon pours and split planes (outlines as drawn)
no net on Bottom Layer "NONET_L04_P002" (solid, pour order 2): 24.13,1207.85 24.13,-121.15 20.13,-125.15 2214.13,-125.15 2214.13,401.88 2189.1,376.85 701.13,376.85 701.13,823.85 707.13,817.85 1853.13,817.85 1853.13,405.48 1867.94,390.67 1868.13,390.85 2220.13,390.85 2220.13,1211.85 2217.13,1214.85
GND on Top Layer "GND_L01_P009" (solid, pour order 9): 1132.04,383.24 1132,383.28 1132,399 1126,399 1123,402 1126.5,405.5 1126.5,416.77 1134.23,416.77 1136,415 1136,406 1157.68,406 1169.68,394 1173,394 1173,393 1154,374 1132,374
GND on Top Layer "GND_L01_P000" (solid, pour order 0): 24,1219 17,1212 17,-117 2211,-117 2217,-111 2217,1226
no net on Top Layer "NONET_L01_P004" (solid, pour order 4): 1007.08,715.65 1010.73,712 1105,712 1105,690 1106,689 1105,688 1097,688 1097,704 1092.57,708.43 1006.19,708.43
no net on Layer 2 (split plane): 2223.9,-124.9 17.1,-124.9 17.1,1219.9 2223.9,1219.9
no net on Layer 1 (split plane): 2223.9,-124.9 17.1,-124.9 17.1,1219.9 2223.9,1219.9

## Other copper
Top Layer:
  pour cut-out: 887,1193 1021,1193 1022,1194 1023,1193 1023,1075 883,1075 882,1076 883,1077 883,1194 1021,1194 1022,1193 1020,1191 1020,1076 886,1076 884,1078

## Silkscreen, mask and mechanical layers (free items; w line width, h text height)
Top Overlay:
  text "PWR" at 365,885 h25
  text "RSSI" at 2081,748 h25
  text "RESET" at 1998,698 h25
  text "TX" at 1955,348 h25
  text "RX" at 1958,289 h25
Bottom Overlay:
  text "5V" at 659,829.17 h25 r270
  text "DIN" at 960,814.76 h25 r270
  text "GND" at 1673.82,793.68 h25 r270
  text "DTR" at 1574,792.68 h25 r270
  text "3.3V" at 760,791.26 h25 r270
  text "RSSI" at 1262,787.35 h25 r270
  text "DIO11" at 1383,780.02 h25 r270
  text "DOUT" at 861,777.89 h25 r270
  text "RES1" at 1452,778.35 h25 r270
  text "DIO12" at 1074,770.85 h25 r270
  text "RESET" at 1161,758.69 h25 r270
  text "DIO5" at 1167,241.26 h25 r270
  text "DIO9" at 962,240.26 h25 r270
  text "RES2" at 1063,240.18 h25 r270
  text "RTS" at 1272,239.68 h25 r270
  text "DIO3" at 1357,239.26 h25 r270
  text "GND" at 649,237.68 h25 r270
  text "CTS" at 860,237.68 h25 r270
  text "DIO2" at 1464,238.26 h25 r270
  text "DIO1" at 1561,237.43 h25 r270
  text "DIO0" at 1671,237.26 h25 r270
  text "DIO4" at 750,236.26 h25 r270
  text "XBEE" at 549,114 h40
  text "EXPLORER" at 621,26 h40
  text "DONGLE" at 580,-63 h40

## Text inside footprints (layer, text, board x,y; h text height)
SJ1: Bottom Overlay "RTS" at 1447,-86 h50
SJ3: Bottom Overlay "DTR" at 1528,1154 h50